# Altium PCB Msp430.PcbDoc
Units mil, origin at the board's own origin, x right, y up, seen from the top; angles counter-clockwise.
Board outline 2300 x 3100 mil, 2 copper layers (TOP, BOTTOM), stack 10.4 mil thick; 39 components, 36 nets, 147 pads, 30 vias.
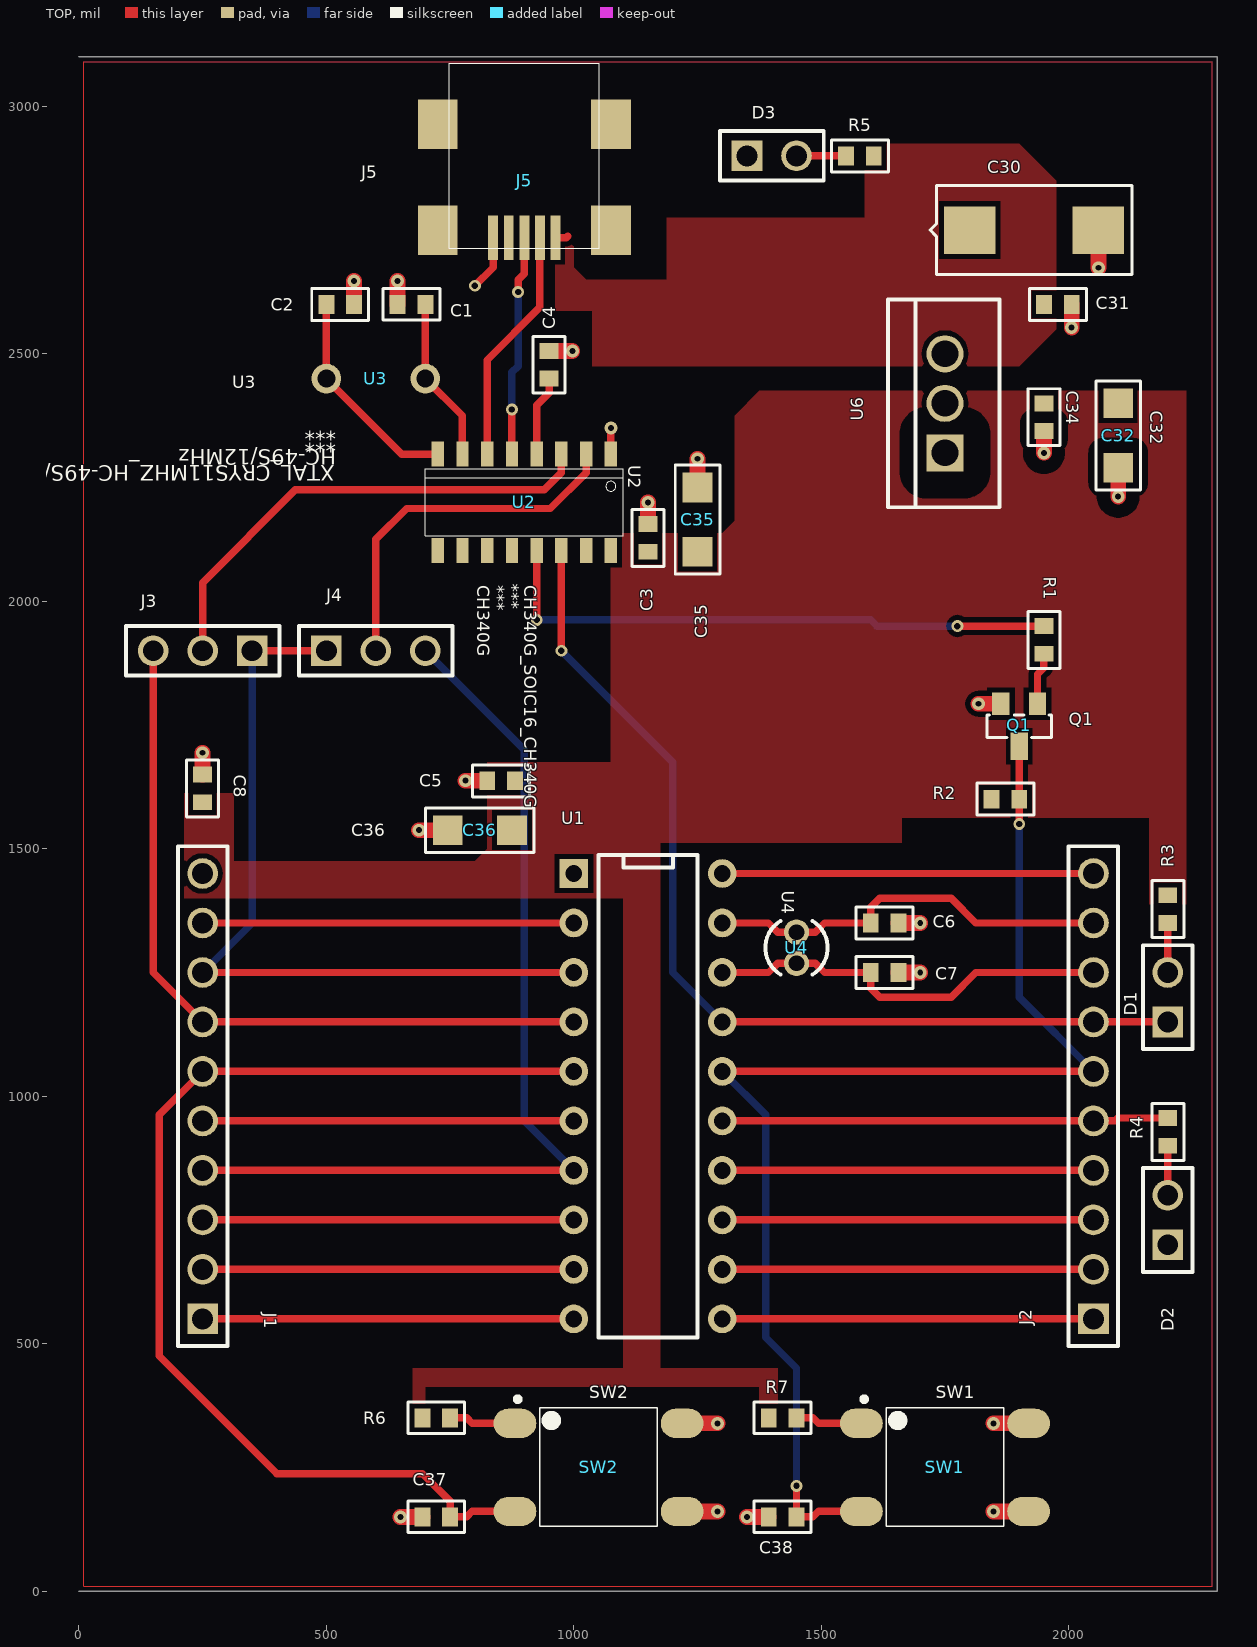
[diagram p0: TOP view]
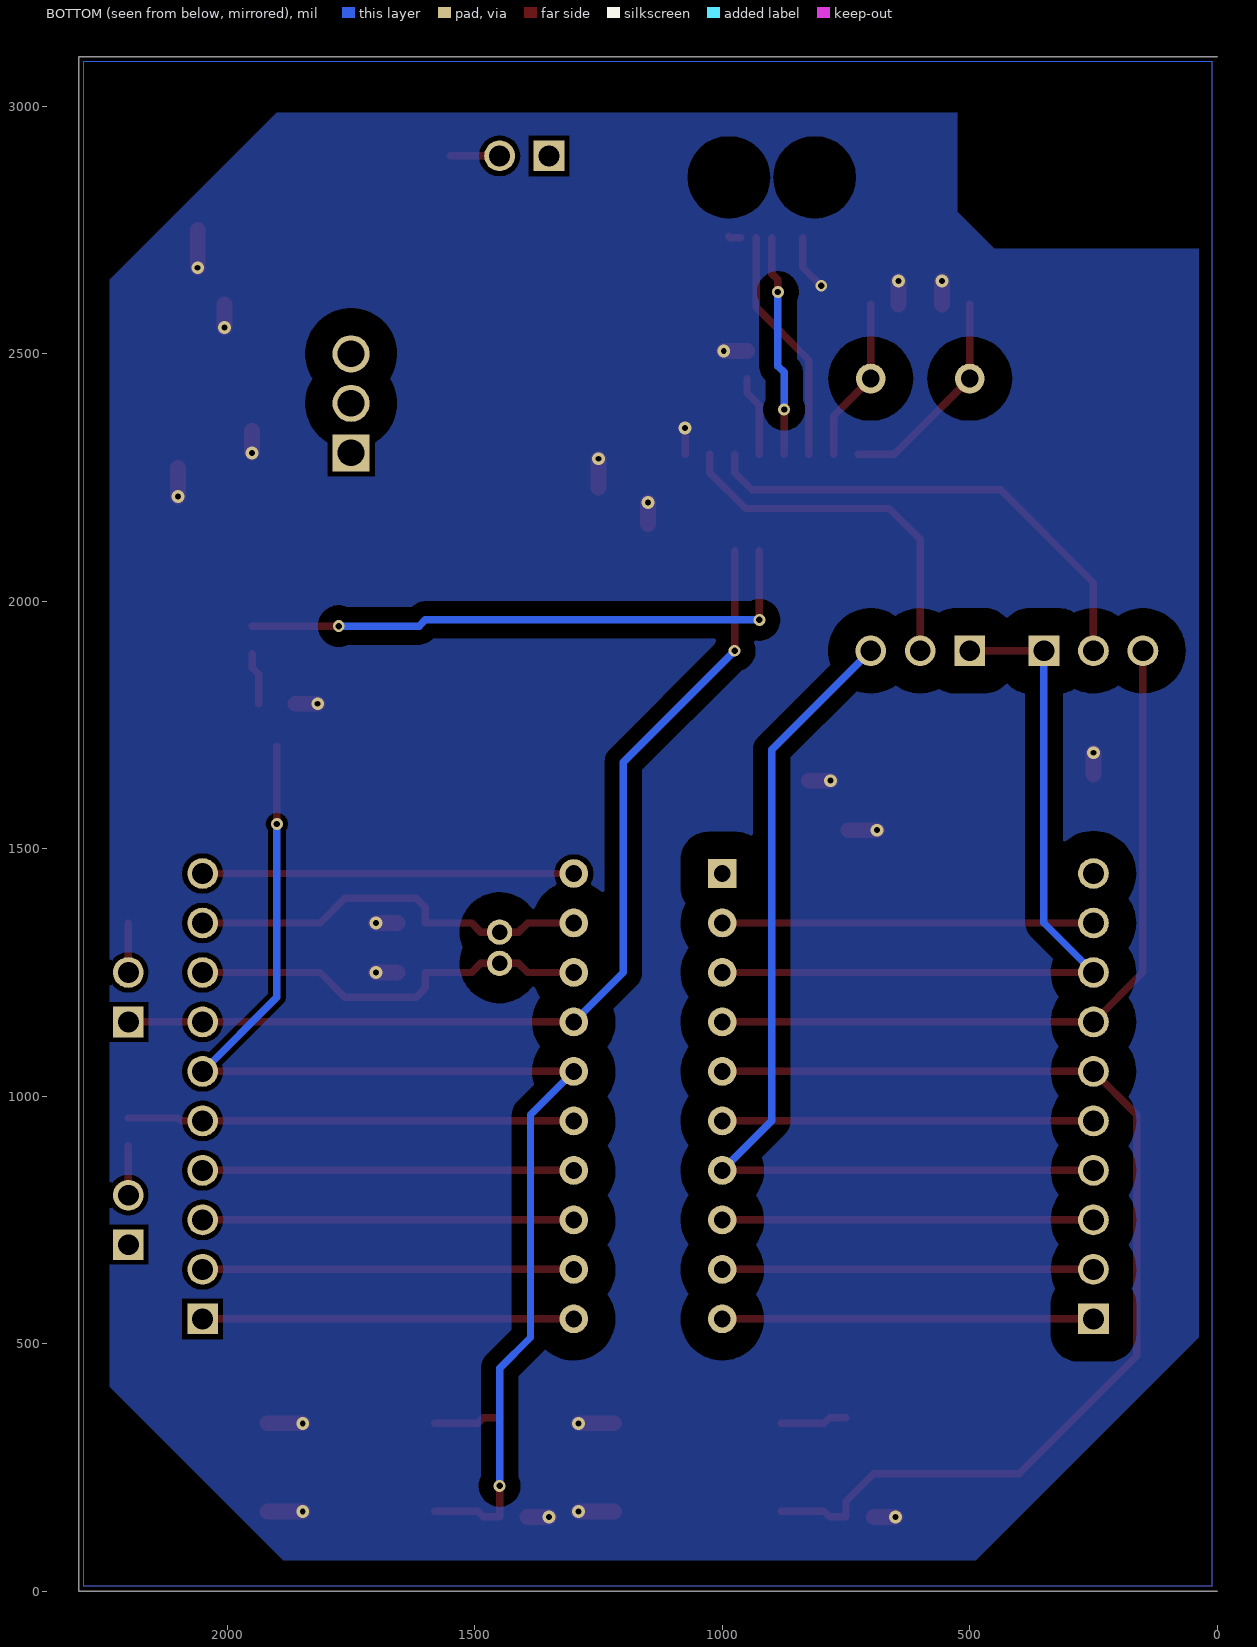
[diagram p1: BOTTOM view, seen from below]

## Layer stack, top to bottom
Top Solder: solder mask 0.4, Solder Resist, Dk 3.5
TOP: signal copper 1.2
Dielectric 1: core 8, FR-4, Dk 4.5
BOTTOM: signal copper 1.2
Bottom Solder: solder mask 0.4, Solder Resist, Dk 3.5

## Board outline
0,0 2300,0 2300,3100 0,3100 2300,3100 2300,0

## Design rules (kind name [scope] priority, off if disabled: settings)
Clearance [All] p1: gap=10 ignorepadtopadclearanceinfootprint=FALSE except(0: Arc-Hole Track-Hole SMDPad-Hole THPad-Hole Via-Hole Fill-Hole Poly-Hole Region-Hole Text-Hole)
PlaneConnect [All] p1: planeconnectstyle=Direct reliefexpansion=20 reliefentries=4 reliefconductorwidth=10 reliefairgap=10
PolygonConnect [All] p1: connectstyle=Direct reliefconductorwidth=10 reliefentries=4 polygonreliefangle="90 Angle" airgapwidth=10
RoutingVias [All] p1: holewidth=28 width=50 viastyle="Through Hole" minholewidth=28 minwidth=50 maxholewidth=28 maxwidth=50
SolderMaskExpansion [All] p1: expansion=4 istentingtop=FALSE
Width [All] p1: maxlimit=10 minlimit=10 preferedwidth=10 impedanceprofiledriven=TRUE minimp=105.260000 maximp=105.260000 favimp=105.260000
29 further rules are at their usual default settings.

## Components (designator, comment, footprint, x,y, rotation, side; value= is the part's Value field where it differs from the comment)
C1 "CAP NP_SMC0603_22PF" SMC0603#1 672,2600.25 r180 top
C2 "CAP NP_SMC0603_22PF" SMC0603#1 528,2599.75 r0 top
C3 "CAP NP_SMC0603_0.1UF" SMC0603#2 1150.25,2128 r90 top
C4 "CAP NP_SMC0603_0.1UF" SMC0603#1 950.25,2478 r90 top
C5 "CAP NP_SMC0603_0.1UF" SMC0603#3 853,1637.25 r0 top
C6 "CAP NP_SMC0603_22PF" SMC0603#2 1628,1349.75 r0 top
C7 "CAP NP_SMC0603_22PF" SMC0603#2 1628,1249.75 r0 top
C8 "CAP NP_SMC0603_0.1UF" SMC0603#3 249.75,1622 r270 top
C30 "CAP_SMCT7343_12_10UF" SMCT7343_12 1923.75,2750 r0 top
C31 "CAP NP_SMC0603_0.1UF" SMC0603#1 1978,2599.75 r0 top
C32 "CAPACITOR NON-POL_SMC1206_10UF" SMC1206 2100,2335 r270 top
C34 "CAP NP_SMC0603_0.1UF" SMC0603#2 1949.75,2372 r270 top
C35 "CAPACITOR NON-POL_SMC1206_10UF" SMC1206 1250,2165 r90 top
C36 "CAPACITOR NON-POL_SMC1206_10UF" SMC1206 810,1537.5 r180 top
C37 "CAP NP_SMC0603_0.1UF" SMC0603#2 722,150.25 r180 top
C38 "CAP NP_SMC0603_0.1UF" SMC0603#2 1422,150.25 r180 top
D1 "LED_BLKCON100VHTM1SQSW1002_RA-LED" BLKCON100VHTM1SQSW1002 2200,1200 r90 top
D2 "LED_BLKCON100VHTM1SQSW1002_RA-LED" BLKCON100VHTM1SQSW1002 2200,750 r90 top
D3 "LED_BLKCON100VHTM1SQSW1002_RA-LED" BLKCON100VHTM1SQSW1002 1400,2900 r0 top
J1 "HEADER 10_BLKCON100VHTM1SQSW10010_SIP10" BLKCON100VHTM1SQSW10010 250,1000 r90 top
J2 "HEADER 10_BLKCON100VHTM1SQSW10010_SIP10" BLKCON100VHTM1SQSW10010 2050,1000 r90 top
J3 "CON3_BLKCON100VHTM1SQSW1003_SIP3" BLKCON100VHTM1SQSW1003 250,1900 r180 top
J4 "CON3_BLKCON100VHTM1SQSW1003_SIP3" BLKCON100VHTM1SQSW1003 600,1900 r0 top
J5 "CON5_MUSB_MSUB" MUSB 900,2900 r180 top
Q1 "BC847AL_SOT23_123_BC547" SOT23_123 1901,1747.5 r180 top
R1 "R_SMR0603_1K" SMR0603 1949.75,1922 r270 top
R2 "R_SMR0603_1K" SMR0603 1872,1600.25 r180 top
R3 "R_SMR0603_1K" SMR0603 2200.25,1378 r90 top
R4 "R_SMR0603_1K" SMR0603 2200.25,928 r90 top
R5 "R_SMR0603_1K" SMR0603 1578,2899.75 r0 top
R6 "R_SMR0603_1K" SMR0603 722,350.25 r180 top
R7 "R_SMR0603_1K" SMR0603 1422,350.25 r180 top
SW1 "SW PUSHBUTTON-SPST-2_RESET_SW_RESET" RESET_SW#1 1750,250.5 r0 top
SW2 "SW PUSHBUTTON-SPST-2_RESET_SW_RESET" RESET_SW#2 1050,250.5 r0 top
U1 "MSP430G2553IN20_0_DIP10020W300L975_MSP430G2553IN" DIP10020W300L975 1150,1000 r270 top
U2 "CH340G_SOIC16_CH340G" SOIC16 900,2200 r270 top
U3 "XTAL_CRYS11MHZ_HC-49S/12MHZ" CRYS11MHZ 600,2452.5 r180 top
U4 "XTAL_XTAL32768_32.768KHZ" XTAL32768 1450,1300 r270 top
U6 "LT1085/LT_TO220AB_LTC1085-3.3" TO220AB 1747.5,2400 r90 top

## Footprints (in the part's own frame and the unit in brackets; to place one, negate y for a bottom-side part, rotate by r counter-clockwise, add the part's x,y. Pads: shape width x height; smd on the part's side, far side on the other; paste and mask are expansions set on the pad)
BLKCON100VHTM1SQSW1002 [mil] "BLKCON100VHTM1SQSW1002"
  rect 62x62 / inner round 60 / far side rect 62x62 hole 42: 1(-50,0)
  round 62 / inner round 60 / far side round 62 hole 42: 2(50,0)
  silkscreen extent -105,-50 105,50, body extent -109,-54 109,54, height 150
BLKCON100VHTM1SQSW1003 [mil] "BLKCON100VHTM1SQSW1003"
  rect 62x62 / inner round 60 / far side rect 62x62 hole 42: 1(-100,0)
  round 62 / inner round 60 / far side round 62 hole 42: 2(0,0) 3(100,0)
  silkscreen extent -155,-50 155,50, body extent -159,-54 159,54, height 150
BLKCON100VHTM1SQSW10010 [mil] "BLKCON100VHTM1SQSW10010"
  rect 62x62 / inner round 60 / far side rect 62x62 hole 42: 1(-450,0)
  round 62 / inner round 60 / far side round 62 hole 42: 2(-350,0) 3(-250,0) 4(-150,0) 5(-50,0) 6(50,0) 7(150,0) 8(250,0) 9(350,0) 10(450,0)
  silkscreen extent -505,-50 505,50, body extent -509,-54 509,54, height 150
CRYS11MHZ [mil] "CRYS11MHZ"
  round 60 hole 36: 1(-100,2.5) 2(100,2.5)
  body extent -200,-88 200,88, height 150
DIP10020W300L975 [mil] "DIP10020W300L975"
  rect 58x58 / inner round 60 / far side rect 58x58 hole 34: 1(-450,-150)
  round 58 / inner round 60 / far side round 58 hole 34: 2(-350,-150) 3(-250,-150) 4(-150,-150) 5(-50,-150) 6(50,-150) 7(150,-150) 8(250,-150) 9(350,-150) 10(450,-150) 11(450,150) 12(350,150) 13(250,150) 14(150,150) 15(50,150) 16(-50,150) 17(-150,150) 18(-250,150) 19(-350,150) 20(-450,150)
  silkscreen extent -488,-100 488,100, body extent -504,-204 504,204, height 150
MUSB [mil] "MUSB"
  rect 20x90 smd: 1(-62.99,165.35) 2(-31.5,165.35) 3(0,165.35) 4(31.5,165.35) 5(62.99,165.35)
  rect 80x100 smd: ""(-175.2,150.59) ""(-175.2,-63.98) ""(175.2,150.59) ""(175.2,-63.98)
  round 45 / inner round 60 / far side round 45 hole 50: ""(-86.61,43.31) ""(86.61,43.31)
  silkscreen extent -152,-187 152,187, body extent -152,-187 152,187, height 150
RESET_SW#1 [mil] "RESET_SW"
  oval 86.61x59.06 smd: 1(-169,88.5) 2(-169,-89.5) 3(169,-89.5) 4(169,88.5)
  TOP lines w32: 97.69,-89.5 169,-89.5 ; 97.69,88.5 169,88.5
  silkscreen extent -168,-120 119,142, body extent -119,-120 119,120, height 150
RESET_SW#2 [mil] "RESET_SW"
  oval 86.61x59.06 smd: 1(-169,88.5) 2(-169,-89.5) 3(169,-89.5) 4(169,88.5)
  TOP lines w32: 169,-89.5 240.3,-89.5 ; 169,88.5 240.3,88.5
  silkscreen extent -168,-120 119,142, body extent -119,-120 119,120, height 150
SMC0603#1 [mil] "SMC0603"
  rect 32x38 smd: 1(-28,0.25) 2(28,0.25)
  TOP lines w32: 28,0.25 28,-46.75
  silkscreen extent -58,-32 58,32, body extent -61,-35 61,35, height 150
SMC0603#2 [mil] "SMC0603"
  rect 32x38 smd: 1(-28,0.25) 2(28,0.25)
  TOP lines w32: 28,0.25 72,0.25
  silkscreen extent -58,-32 58,32, body extent -60,-35 60,35, height 150
SMC0603#3 [mil] "SMC0603"
  rect 32x38 smd: 1(-28,0.25) 2(28,0.25)
  TOP lines w32: -72,0.25 -28,0.25
  silkscreen extent -58,-32 58,32, body extent -60,-35 60,35, height 150
SMC1206 [mil] "SMC1206"
  rect 60x60 smd: 1(-65,0) 2(65,0)
  TOP lines w32: 123,0 65,0
  silkscreen extent -110,-45 110,45, body extent -113,-48 113,48, height 150
SMCT7343_12 [mil] "SMCT7343_12"
  rect 104x96 smd: 1(-123.75,0) 2(136.25,0)
  TOP lines w32: 136.25,-76 136.25,0
  silkscreen extent -204,-90 204,90, body extent -207,-93 207,93, height 150
SMR0603 [mil] "SMR0603"
  rect 32x38 smd: 1(-28,0.25) 2(28,0.25)
  silkscreen extent -58,-32 58,32, body extent -61,-35 61,35, height 150
SOIC16 [mil] "SOIC16"
  rect 50x25 smd: 1(-97.5,175) 2(-97.5,125) 3(-97.5,75) 4(-97.5,25) 5(-97.5,-25) 6(-97.5,-75) 7(-97.5,-125) 8(-97.5,-175) 9(97.5,-175) 10(97.5,-125) 11(97.5,-75) 12(97.5,-25) 13(97.5,25) 14(97.5,75) 15(97.5,125) 16(97.5,175)
  TOP lines w15: -97.5,175 -150.5,175
  silkscreen extent -68,-200 68,200, body extent -125,-200 125,200, height 150
SOT23_123 [mil] "SOT23_123"
  rect 35x45 smd: 1(-36,-45.5) 2(38,-45.5)
  rect 35x55 smd: 3(1,40.5)
  TOP lines w32: 83.5,-45.5 38,-45.5
  silkscreen extent -64,-23 66,23, body extent -61,-53 61,53, height 150
TO220AB [mil] "TO220AB"
  rect 75x75 / inner round 60 / far side rect 75x75 hole 54: 1(-100,-2.5)
  round 75 / inner round 60 / far side round 75 hole 54: 2(0,-2.5) 3(100,-2.5)
  silkscreen extent -210,-113 210,113, body extent -214,-117 214,117, height 150
XTAL32768 [mil] "XTAL32768"
  round 51.18 / inner round 60 / far side round 51.18 hole 31.5: 1(-31.5,0) 2(31.5,0)
  silkscreen extent -54,-63 54,63, body extent -71,-71 71,71, height 150

## Free pads (board coordinates)
  round 100 / inner round 60 / far side round 100 hole 110: ""(100,100) ""(100,3000) ""(2200,100) ""(2200,3000)

## Via types
v1: diameter 26, hole 12, TOP to BOTTOM, 22 vias
v2: diameter 24, hole 13, TOP to BOTTOM, 8 vias

## Nets (pads, with @x,y where several pads share a name; then routed paths per layer and width w, separated by ;. In a path a pad name is that pad's centre, name@x,y a point inside that pad or via, vN(x,y) a via of type N, cw(c..) or ccw(c..) an arc to the next point about the centre after c; other vN are vias at no path point)
DM:  | length 481.3
  TOP w15: 825,2297.5 825,2487.49 931.5,2593.99 931.5,2734.65
DP:  | length 447.5
  TOP w15: 875,2297.5 v2(875,2387.5) ; v2(887.5,2625) 887.5,2649.5 900,2662 900,2734.65
  BOTTOM w15: v2(875,2387.5) 875,2462.5 887.5,2475 v2(887.5,2625)
DTR:  | length 1170.2
  TOP w15: v2(925,1962.5) 925,2102.5 ; v2(1775,1950) 1950,1950
  BOTTOM w15: v2(925,1962.5) 1600,1962.5 1612.5,1950 v2(1775,1950)
GND:  | length 862.5
  TOP w15: v2(800,2637.5) 837.01,2674.51 837.01,2734.65 ; 1300,1450 2050,1450
  other v1: 650,150 1350,150 1290.3,161 1847.69,161 1290.3,339 1847.69,339 1700,1250 1700,1350 687,1537.5 781,1637.5 250,1694 1817.5,1793 1150,2200 2100,2212 1250,2288 1950,2300 1075,2350.5 997,2506 2006,2553 556,2647 644,2647 2060,2674
ID: 
N00296:  | length 438.2
  TOP w15: 500,2600 500,2450 652.5,2297.5 725,2297.5
N00303:  | length 333.6
  TOP w15: 700,2600 700,2450 775,2375 775,2297.5
N00442:  | length 162.9
  TOP w15: 925,2297.5 925,2396.5 950,2421.5 950,2450
N04021:  | length 100
  TOP w15: 2200,1250 2200,1350
N04124:  | length 100
  TOP w15: 2200,800 2200,900
N04260:  | length 100
  TOP w15: 1450,2900 1550,2900
N06554:  | length 135.6
  TOP w15: 750,350 783.38,350 794.38,339 881,339
N06863:  | length 135.6
  TOP w15: 1450,350 1483.38,350 1494.38,339 1581,339
N007191:  | length 106.4
  TOP w15: 1937,1793 1937,1852.5 1950,1865.5 1950,1894
P1.0:  | length 750
  TOP w15: 250,1350 1000,1350
P1.1:  | length 1591.4
  TOP w15: 250,1250 1000,1250 ; 350,1900 500,1900
  BOTTOM w15: 250,1250 350,1350 350,1900
P1.2:  | length 1541.4
  TOP w15: 150,1900 150,1250 250,1150 1000,1150
P1.3:  | length 2237.4
  TOP w15: 881,161 794.38,161 783.38,150 750,150 750,181.5 694,237.5 400,237.5 162.5,475 162.5,962.5 250,1050 1000,1050
P1.4:  | length 750
  TOP w15: 250,950 1000,950
P1.5:  | length 1924.3
  TOP w15: 250,850 1000,850
  BOTTOM w15: 700,1900 900,1700 900,950 1000,850
P1.6:  | length 750
  TOP w15: 1300,850 2050,850
P1.7:  | length 902.5
  TOP w15: 1300,950 2050,950 2093.5,950 2099.5,956 2200,956
P2.0:  | length 750
  TOP w15: 250,750 1000,750
P2.1:  | length 750
  TOP w15: 250,650 1000,650
P2.2:  | length 750
  TOP w15: 250,550 1000,550
P2.3:  | length 750
  TOP w15: 1300,550 2050,550
P2.4:  | length 750
  TOP w15: 1300,650 2050,650
P2.5:  | length 750
  TOP w15: 1300,750 2050,750
RESET:  | length 2566.8
  TOP w15: 1300,1050 2050,1050 ; v2(1450,212.5) 1450,150 1483.38,150 1494.38,161 1581,161 ; v2(1900,1550) 1900,1600 1900,1707
  BOTTOM w15: 1300,1050 1387.5,962.5 1387.5,512.5 1450,450 v2(1450,212.5) ; v2(1900,1550) 1900,1200 2050,1050
RTS/TEST:  | length 1987.1
  TOP w15: v2(975,1900) 975,2102.5 ; 1300,1150 2050,1150 2200,1150
  BOTTOM w15: v2(975,1900) 1200,1675 1200,1250 1300,1150
RXD:  | length 992.2
  TOP w15: 250,1900 250,2037.5 437.5,2225 940,2225 975,2260 975,2297.5
TXD:  | length 743.4
  TOP w15: 600,1900 600,2125 662.5,2187.5 952.5,2187.5 1025,2260 1025,2297.5
VCC+3.3V: 
VCC+5V:  | length 25.7
  TOP w15: 962.99,2734.65 984.65,2734.65 987.5,2737.5
XIN:  | length 825.2
  TOP w15: 1300,1350 1393.4,1350 1411.9,1331.5 1450,1331.5 1488.1,1331.5 1506.6,1350 1600,1350 1600,1381.5 1618.5,1400 1762.5,1400 1812.5,1350 2050,1350
XOUT:  | length 825.2
  TOP w15: 1300,1250 1393.4,1250 1411.9,1268.5 1450,1268.5 1488.1,1268.5 1506.6,1250 1600,1250 1600,1218.5 1618.5,1200 1762.5,1200 1812.5,1250 2050,1250
pads on no net: C1.1 C1.2 C2.1 C2.2 C3.1 C3.2 C4.1 C4.2 C5.1 C5.2 C6.1 C6.2 C7.1 C7.2 C8.1 C8.2 C30.1 C30.2 C31.1 C31.2 C32.1 C32.2 C34.1 C34.2 C35.1 C35.2 C36.1 C36.2 C37.1 C37.2 C38.1 C38.2 D1.1 D1.2 D2.1 D2.2 D3.1 D3.2 J1.1 J1.2 J1.3 J1.4 J1.5 J1.6 J1.7 J1.8 J1.9 J1.10 J2.1 J2.2 J2.3 J2.4 J2.5 J2.6 J2.7 J2.8 J2.9 J2.10 J3.1 J3.2 J3.3 J4.1 J4.2 J4.3 J5. J5.1 J5.2 J5.3 J5.4 J5.5 Q1.1 Q1.2 Q1.3 R1.1 R1.2 R2.1 R2.2 R3.1 R3.2 R4.1 R4.2 R5.1 R5.2 R6.1 R6.2 R7.1 R7.2 SW1.1 SW1.2 SW1.3 SW1.4 SW2.1 SW2.2 SW2.3 SW2.4 U1.1 U1.2 U1.3 U1.4 U1.5 U1.6 U1.7 U1.8 U1.9 U1.10 U1.11 U1.12 U1.13 U1.14 U1.15 U1.16 U1.17 U1.18 U1.19 U1.20 U2.1 U2.2 U2.3 U2.4 U2.5 U2.6 U2.7 U2.8 U2.9 U2.10 U2.11 U2.12 U2.13 U2.14 U2.15 U2.16 U3.1 U3.2 U4.1 U4.2 U6.1 U6.2 U6.3

## Polygon pours and split planes (outlines as drawn)
VCC+3.3V on TOP "TOP-VCC+3.3V" (solid, pour order 1): 1075,2137.5 1075,1675 825,1675 825,1500 800,1475 312.5,1475 312.5,1612.5 212.5,1612.5 212.5,1400 1100,1400 1100,450 675,450 675,325 700,325 700,412.5 1375,412.5 1375,312.5 1412.5,312.5 1412.5,450 1175,450 1175,1512.5 1662.5,1512.5 1662.5,1562.5 2162.5,1562.5 2162.5,1387.5 2237.5,1387.5 2237.5,2425 1375,2425 1325,2375 1325,2162.5 1300,2137.5 1075,2137.5
VCC+5V on TOP "TOP-VCC+5V" (solid, pour order 0): 1975,2850 1975,2550 1900,2475 1037.5,2475 1037.5,2587.5 962.5,2587.5 962.5,2775 1000,2775 1000,2675 1025,2650 1187.5,2650 1187.5,2775 1587.5,2775 1587.5,2925 1900,2925 1975,2850
GND on BOTTOM "BOTTOM-GND" (solid, pour order 2): 37.5,2712.5 450,2712.5 525,2787.5 525,2987.5 1900,2987.5 2237.5,2650 2237.5,412.5 1887.5,62.5 487.5,62.5 37.5,512.5 37.5,2712.5

## Other copper
TOP:
  pour cut-out net VCC+3.3V: 1900.98,2328 1900.98,2360 1901.09,2362.62 1901.44,2365.21 1902,2367.77 1902.79,2370.27 1903.79,2372.69 1905,2375.01 1906.41,2377.22 1908,2379.3 1909.77,2381.23 1911.7,2383 1913.78,2384.59 1915.99,2386 1918.31,2387.21 1920.73,2388.21 1923.23,2389 1925.79,2389.56 1928.38,2389.91 1931,2390.02 1969,2390.02 1971.62,2389.91 1974.21,2389.56 1976.77,2389 1979.27,2388.21 1981.69,2387.21 1984.01,2386 1986.22,2384.59 1988.3,2383 1990.23,2381.23 1992,2379.3 1993.59,2377.22 1995,2375.01 1996.21,2372.69 1997.21,2370.27 1998,2367.77 1998.56,2365.21 1998.91,2362.62 1999.02,2360 1999.02,2328 1998.9,2325.38 1998.56,2322.79 1997.99,2320.23 1997.21,2317.73 1996.2,2315.32 1994.99,2312.99 1993.59,2310.79 1992.1,2308.84 1992.71,2305.14 1993,2301.4 1993.02,2300 1992.86,2296.25 1992.37,2292.53 1991.55,2288.87 1990.43,2285.29 1988.99,2281.82 1987.26,2278.49 1985.24,2275.32 1982.96,2272.35 1980.42,2269.58 1977.65,2267.04 1974.68,2264.76 1971.51,2262.74 1968.18,2261.01 1964.71,2259.57 1961.13,2258.45 1957.47,2257.63 1953.75,2257.14 1950,2256.98 1946.25,2257.14 1942.53,2257.63 1938.87,2258.45 1935.29,2259.57 1931.82,2261.01 1928.49,2262.74 1925.32,2264.76 1922.35,2267.04 1919.58,2269.58 1917.04,2272.35 1914.76,2275.32 1912.74,2278.49 1911.01,2281.82 1909.57,2285.29 1908.45,2288.87 1907.63,2292.53 1907.14,2296.25 1906.98,2300 1907.14,2303.75 1907.64,2307.47 1907.9,2308.84 1906.32,2310.93 1904.92,2313.14 1903.73,2315.47 1902.74,2317.9 1901.96,2320.4 1901.41,2322.96 1901.08,2325.55 1900.98,2328
  pour cut-out net VCC+3.3V: 2039.98,2240 2039.98,2300 2040.09,2302.62 2040.44,2305.21 2041,2307.77 2041.79,2310.27 2042.79,2312.69 2044,2315.01 2045.41,2317.22 2047,2319.3 2048.77,2321.23 2050.7,2323 2052.78,2324.59 2054.99,2326 2057.31,2327.21 2059.73,2328.21 2062.23,2329 2064.79,2329.56 2067.38,2329.91 2070,2330.02 2130,2330.02 2132.62,2329.91 2135.21,2329.56 2137.77,2329 2140.27,2328.21 2142.69,2327.21 2145.01,2326 2147.22,2324.59 2149.3,2323 2151.23,2321.23 2153,2319.3 2154.59,2317.22 2156,2315.01 2157.21,2312.69 2158.21,2310.27 2159,2307.77 2159.56,2305.21 2159.91,2302.62 2160.02,2300 2160.02,2240 2159.91,2237.38 2159.56,2234.79 2159,2232.23 2158.21,2229.73 2157.21,2227.32 2156,2224.99 2154.59,2222.79 2153,2220.71 2151.23,2218.78 2149.3,2217.01 2147.22,2215.41 2145.01,2214.01 2143.01,2212.95 2143.02,2212 2142.86,2208.25 2142.37,2204.53 2141.55,2200.87 2140.43,2197.29 2138.99,2193.82 2137.26,2190.49 2135.24,2187.32 2132.96,2184.35 2130.42,2181.58 2127.65,2179.04 2124.68,2176.76 2121.51,2174.74 2118.18,2173.01 2114.71,2171.57 2111.13,2170.45 2107.47,2169.63 2103.75,2169.14 2100,2168.98 2096.25,2169.14 2092.53,2169.63 2088.87,2170.45 2085.29,2171.57 2081.82,2173.01 2078.49,2174.74 2075.32,2176.76 2072.35,2179.04 2069.58,2181.58 2067.04,2184.35 2064.76,2187.32 2062.74,2190.49 2061.01,2193.82 2059.57,2197.29 2058.45,2200.87 2057.63,2204.53 2057.14,2208.25 2056.98,2212 2056.99,2212.95 2054.68,2214.19 2052.49,2215.62 2050.43,2217.24 2048.52,2219.03 2046.78,2220.98 2045.21,2223.08 2043.83,2225.3 2042.64,2227.64 2041.67,2230.07 2040.91,2232.57 2040.38,2235.14 2040.07,2237.74 2039.98,2240
  pour cut-out net VCC+3.3V: 1657.48,2262.5 1657.48,2337.5 1657.69,2342.3 1658.32,2347.05 1659.35,2351.74 1660.8,2356.32 1662.63,2360.75 1664.85,2365.01 1667.43,2369.06 1670.35,2372.87 1673.6,2376.41 1677.13,2379.65 1680.94,2382.57 1684.99,2385.15 1689.25,2387.37 1693.68,2389.2 1698.26,2390.65 1702.95,2391.68 1707.7,2392.31 1712.5,2392.52 1787.5,2392.52 1792.3,2392.31 1797.05,2391.68 1801.74,2390.65 1806.32,2389.2 1810.75,2387.37 1815.01,2385.15 1819.06,2382.57 1822.87,2379.65 1826.4,2376.41 1829.65,2372.87 1832.57,2369.06 1835.15,2365.01 1837.37,2360.75 1839.2,2356.32 1840.65,2351.74 1841.68,2347.05 1842.31,2342.3 1842.52,2337.5 1842.52,2262.5 1842.31,2257.7 1841.68,2252.95 1840.65,2248.26 1839.2,2243.68 1837.37,2239.25 1835.15,2234.99 1832.57,2230.94 1829.65,2227.13 1826.4,2223.59 1822.87,2220.35 1819.06,2217.43 1815.01,2214.85 1810.75,2212.63 1806.32,2210.8 1801.74,2209.35 1797.05,2208.32 1792.3,2207.69 1787.5,2207.48 1712.5,2207.48 1707.7,2207.69 1702.95,2208.32 1698.26,2209.35 1693.68,2210.8 1689.25,2212.63 1684.99,2214.85 1680.94,2217.43 1677.13,2220.35 1673.6,2223.59 1670.35,2227.13 1667.43,2230.94 1664.85,2234.99 1662.63,2239.25 1660.8,2243.68 1659.35,2248.26 1658.32,2252.95 1657.69,2257.7 1657.48,2262.5
BOTTOM:
  pour cut-out net GND: 585.43,2450 583.79,2466.67 578.93,2482.69 571.03,2497.46 560.41,2510.41 547.46,2521.03 532.69,2528.93 516.67,2533.79 500,2535.43 483.33,2533.79 467.31,2528.93 457.47,2523.67 452.54,2521.03 439.59,2510.41 428.97,2497.46 421.07,2482.69 416.21,2466.67 414.57,2450 416.21,2433.33 421.07,2417.31 428.97,2402.54 439.59,2389.59 452.54,2378.97 457.47,2376.33 467.31,2371.07 483.33,2366.21 500,2364.57 516.67,2366.21 532.69,2371.07 547.46,2378.97 560.41,2389.59 571.03,2402.54 578.93,2417.31 583.79,2433.33 585.43,2450
  pour cut-out net GND: 785.43,2450 783.79,2466.67 778.93,2482.69 771.03,2497.46 760.41,2510.41 747.46,2521.03 732.69,2528.93 716.67,2533.79 700,2535.43 683.33,2533.79 667.31,2528.93 657.47,2523.67 652.54,2521.03 639.59,2510.41 628.97,2497.46 621.07,2482.69 616.21,2466.67 614.57,2450 616.21,2433.33 621.07,2417.31 628.97,2402.54 639.59,2389.59 652.54,2378.97 657.47,2376.33 667.31,2371.07 683.33,2366.21 700,2364.57 716.67,2366.21 732.69,2371.07 747.46,2378.97 760.41,2389.59 771.03,2402.54 778.93,2417.31 783.79,2433.33 785.43,2450
  pour cut-out net GND: 896.81,2856.69 895.21,2872.96 890.46,2888.61 882.75,2903.04 872.38,2915.68 859.74,2926.05 845.31,2933.76 829.66,2938.51 813.39,2940.11 797.12,2938.51 781.47,2933.76 771.86,2928.63 767.04,2926.05 754.4,2915.68 744.03,2903.04 736.32,2888.61 731.57,2872.96 729.97,2856.69 731.57,2840.42 736.32,2824.77 744.03,2810.34 754.4,2797.7 767.04,2787.33 771.86,2784.75 781.47,2779.62 797.12,2774.87 813.39,2773.27 829.66,2774.87 845.31,2779.62 859.74,2787.33 872.38,2797.7 882.75,2810.34 890.46,2824.77 895.21,2840.42 896.81,2856.69
  pour cut-out net GND: 1070.03,2856.69 1068.43,2872.96 1063.68,2888.61 1055.97,2903.04 1045.6,2915.68 1032.96,2926.05 1018.53,2933.76 1002.88,2938.51 986.61,2940.11 970.34,2938.51 954.69,2933.76 945.08,2928.63 940.26,2926.05 927.62,2915.68 917.25,2903.04 909.54,2888.61 904.79,2872.96 903.19,2856.69 904.79,2840.42 909.54,2824.77 917.25,2810.34 927.62,2797.7 940.26,2787.33 945.08,2784.75 954.69,2779.62 970.34,2774.87 986.61,2773.27 1002.88,2774.87 1018.53,2779.62 1032.96,2787.33 1045.6,2797.7 1055.97,2810.34 1063.68,2824.77 1068.43,2840.42 1070.03,2856.69
  pour cut-out net GND: 849.98,2490.54 849.98,2606.07 848.47,2609.41 847.26,2612.87 846.36,2616.43 845.77,2620.04 845.5,2623.7 845.48,2625 845.64,2628.66 846.12,2632.3 846.91,2635.88 848.01,2639.37 849.42,2642.76 851.11,2646.01 853.08,2649.1 855.31,2652.01 857.79,2654.71 860.49,2657.19 863.4,2659.42 866.49,2661.39 869.74,2663.08 873.13,2664.49 876.62,2665.59 880.2,2666.38 883.84,2666.86 887.5,2667.02 891.16,2666.86 894.8,2666.38 898.38,2665.59 901.87,2664.49 905.26,2663.08 908.51,2661.39 911.6,2659.42 914.51,2657.19 917.21,2654.71 919.69,2652.01 921.92,2649.1 923.89,2646.01 925.58,2642.76 926.99,2639.37 928.09,2635.88 928.88,2632.3 929.36,2628.66 929.52,2625 929.36,2621.34 928.88,2617.7 928.09,2614.12 926.99,2610.63 925.59,2607.24 925.02,2606.07 925.02,2475 924.88,2471.73 924.45,2468.49 923.74,2465.29 922.76,2462.17 921.5,2459.14 919.99,2456.24 918.24,2453.48 916.24,2450.88 914.03,2448.47 912.52,2446.96 912.52,2406.43 914.03,2403.09 915.24,2399.63 916.14,2396.07 916.73,2392.46 917,2388.8 917.02,2387.5 916.86,2383.84 916.38,2380.2 915.59,2376.62 914.49,2373.13 913.08,2369.74 911.39,2366.49 909.42,2363.4 907.19,2360.49 904.71,2357.79 902.01,2355.31 899.1,2353.08 896.01,2351.11 892.76,2349.42 889.37,2348.01 885.88,2346.91 882.3,2346.12 878.66,2345.64 875,2345.48 871.34,2345.64 867.7,2346.12 864.12,2346.91 860.63,2348.01 857.24,2349.42 853.99,2351.11 850.9,2353.08 847.99,2355.31 845.29,2357.79 842.81,2360.49 840.58,2363.4 838.61,2366.49 836.92,2369.74 835.51,2373.13 834.41,2376.62 833.62,2380.2 833.14,2383.84 832.98,2387.5 833.14,2391.16 833.62,2394.8 834.41,2398.38 835.51,2401.87 836.91,2405.26 837.48,2406.43 837.48,2462.5 837.62,2465.77 838.05,2469.01 838.76,2472.21 839.74,2475.33 841,2478.36 842.51,2481.26 844.26,2484.02 846.26,2486.62 848.47,2489.03 849.98,2490.54
  pour cut-out net GND: 1827.85,2450 1831.91,2443.02 1835.35,2435.72 1838.14,2428.15 1840.25,2420.36 1841.68,2412.41 1842.42,2404.38 1842.52,2400 1842.17,2391.94 1841.11,2383.93 1839.37,2376.05 1836.94,2368.36 1833.85,2360.9 1830.12,2353.74 1825.79,2346.93 1820.87,2340.53 1815.42,2334.58 1809.47,2329.13 1803.07,2324.21 1796.26,2319.88 1789.1,2316.15 1781.64,2313.06 1773.95,2310.63 1766.07,2308.89 1758.06,2307.83 1750,2307.48 1741.94,2307.83 1733.93,2308.89 1726.05,2310.63 1718.36,2313.06 1710.9,2316.15 1703.74,2319.88 1696.93,2324.21 1690.53,2329.13 1684.58,2334.58 1679.13,2340.53 1674.21,2346.93 1669.88,2353.74 1666.15,2360.9 1663.06,2368.36 1660.63,2376.05 1658.89,2383.93 1657.83,2391.94 1657.48,2400 1657.83,2408.06 1658.88,2416.07 1660.63,2423.95 1663.06,2431.64 1666.15,2439.1 1669.87,2446.26 1672.15,2450 1668.09,2456.98 1664.65,2464.28 1661.86,2471.85 1659.75,2479.64 1658.32,2487.59 1657.58,2495.62 1657.48,2500 1657.83,2508.06 1658.89,2516.07 1660.63,2523.95 1663.06,2531.64 1666.15,2539.1 1669.88,2546.26 1674.21,2553.07 1679.13,2559.47 1684.58,2565.42 1690.53,2570.87 1696.93,2575.79 1703.74,2580.12 1710.9,2583.85 1718.36,2586.94 1726.05,2589.37 1733.93,2591.11 1741.94,2592.17 1750,2592.52 1758.06,2592.17 1766.07,2591.11 1773.95,2589.37 1781.64,2586.94 1789.1,2583.85 1796.26,2580.12 1803.07,2575.79 1809.47,2570.87 1815.42,2565.42 1820.87,2559.47 1825.79,2553.07 1830.12,2546.26 1833.85,2539.1 1836.94,2531.64 1839.37,2523.95 1841.11,2516.07 1842.17,2508.06 1842.52,2500 1842.17,2491.94 1841.12,2483.93 1839.37,2476.05 1836.94,2468.36 1833.85,2460.9 1830.13,2453.74 1827.85,2450
  pour cut-out net GND: 663 vertices and 0 holes, not listed, extent 882.98,170.48 1817.02,2004.52
  pour cut-out net GND: 1010 vertices and 0 holes, not listed, extent 63.98,463.98 1084.02,1986.02
Multi-Layer:
  lines w1: 10,10 10,3090 ; 10,10 2290,10 ; 10,10 10,3090 ; 10,10 2290,10 ; 10,3090 2290,3090 ; 10,3090 2290,3090 ; 2290,10 2290,3090 ; 2290,10 2290,3090

## Silkscreen, mask and mechanical layers (free items; w line width, h text height)
DESIGN_OUTLINE:
  lines w1: 0,0 2300,0 2300,3100 0,3100 0,0
  lines w5: 0,0 2300,0 2300,3100 0,3100 0,0
DRAWING_ORIGIN:
  lines w1: -25,0 25,0 ; 0,-25 0,25

## Text inside footprints (layer, text, board x,y; h text height)
C1: PIN_NUMBER "2" at 634,2600 h25 r180; PIN_NUMBER "1" at 690,2600 h25 r180
C2: PIN_NUMBER "2" at 546,2600 h25; PIN_NUMBER "1" at 490,2600 h25
C3: PIN_NUMBER "2" at 1140,2156 h25 r90; PIN_NUMBER "1" at 1140,2100 h25 r90
C4: PIN_NUMBER "2" at 940,2506 h25 r90; PIN_NUMBER "1" at 940,2450 h25 r90
C5: PIN_NUMBER "1" at 815,1637.5 h25; PIN_NUMBER "2" at 871,1637.5 h25
C6: PIN_NUMBER "2" at 1646,1350 h25; PIN_NUMBER "1" at 1590,1350 h25
C7: PIN_NUMBER "2" at 1646,1250 h25; PIN_NUMBER "1" at 1590,1250 h25
C8: PIN_NUMBER "1" at 240,1650 h25 r270; PIN_NUMBER "2" at 240,1594 h25 r270
C30: PIN_NUMBER "2" at 2054,2750 h15; PIN_NUMBER "1" at 1794,2750 h15
C31: PIN_NUMBER "2" at 1996,2600 h25; PIN_NUMBER "1" at 1940,2600 h25
C32: PIN_NUMBER "2" at 2090,2270 h25 r270; PIN_NUMBER "1" at 2090,2400 h25 r270
C34: PIN_NUMBER "2" at 1940,2344 h25 r270; PIN_NUMBER "1" at 1940,2400 h25 r270
C35: PIN_NUMBER "2" at 1240,2230 h25 r90; PIN_NUMBER "1" at 1240,2100 h25 r90
C36: PIN_NUMBER "2" at 735,1537.5 h25 r180; PIN_NUMBER "1" at 865,1537.5 h25 r180
C37: PIN_NUMBER "2" at 684,150 h25 r180; PIN_NUMBER "1" at 740,150 h25 r180
C38: PIN_NUMBER "2" at 1384,150 h25 r180; PIN_NUMBER "1" at 1440,150 h25 r180
D1: PIN_NUMBER "1" at 2190,1150 h25 r90; PIN_NUMBER "2" at 2190,1250 h25 r90
D2: PIN_NUMBER "1" at 2190,700 h25 r90; PIN_NUMBER "2" at 2190,800 h25 r90
D3: PIN_NUMBER "1" at 1270,2885 h15; PIN_NUMBER "1" at 1340,2900 h25; PIN_NUMBER "2" at 1440,2900 h25
J1: PIN_NUMBER "10" at 230,1450 h25 r90; PIN_NUMBER "9" at 240,1350 h25 r90; PIN_NUMBER "8" at 240,1250 h25 r90; PIN_NUMBER "7" at 240,1150 h25 r90; PIN_NUMBER "6" at 240,1050 h25 r90; PIN_NUMBER "5" at 240,950 h25 r90; PIN_NUMBER "4" at 240,850 h25 r90; PIN_NUMBER "3" at 240,750 h25 r90; PIN_NUMBER "2" at 240,650 h25 r90; PIN_NUMBER "1" at 240,550 h25 r90
J2: PIN_NUMBER "10" at 2030,1450 h25 r90; PIN_NUMBER "7" at 2040,1150 h25 r90; PIN_NUMBER "6" at 2040,1050 h25 r90; PIN_NUMBER "4" at 2040,850 h25 r90; PIN_NUMBER "5" at 2040,950 h25 r90; PIN_NUMBER "1" at 2040,550 h25 r90; PIN_NUMBER "2" at 2040,650 h25 r90; PIN_NUMBER "3" at 2040,750 h25 r90; PIN_NUMBER "9" at 2040,1350 h25 r90; PIN_NUMBER "8" at 2040,1250 h25 r90
J3: PIN_NUMBER "2" at 240,1900 h25 r180; PIN_NUMBER "1" at 340,1900 h25 r180; PIN_NUMBER "3" at 140,1900 h25 r180
J4: PIN_NUMBER "2" at 590,1900 h25; PIN_NUMBER "1" at 490,1900 h25; PIN_NUMBER "3" at 690,1900 h25
J5: PIN_NUMBER "4" at 858.5,2734.65 h25 r180; PIN_NUMBER "3" at 890,2734.65 h25 r180; PIN_NUMBER "5" at 827.01,2734.65 h25 r180; PIN_NUMBER "2" at 921.5,2734.65 h25 r180; PIN_NUMBER "1" at 952.99,2734.65 h25 r180; ASSEMBLY_TOP "J*" at 1003.94,2645.28 h25 r180
Q1: PIN_NUMBER "2" at 1853,1793 h25 r180; PIN_NUMBER "1" at 1927,1793 h25 r180; PIN_NUMBER "3" at 1890,1707 h25 r180; ASSEMBLY_TOP "SOT23_123" at 1775,1837.5 h25 r180; ASSEMBLY_TOP "BC547" at 1975,1880 h25 r180
R1: PIN_NUMBER "1" at 1940,1950 h25 r270; PIN_NUMBER "2" at 1940,1894 h25 r270
R2: PIN_NUMBER "2" at 1834,1600 h25 r180; PIN_NUMBER "1" at 1890,1600 h25 r180
R3: PIN_NUMBER "2" at 2190,1406 h25 r90; PIN_NUMBER "1" at 2190,1350 h25 r90
R4: PIN_NUMBER "2" at 2190,956 h25 r90; PIN_NUMBER "1" at 2190,900 h25 r90
R5: PIN_NUMBER "1" at 1544,2900 h15; PIN_NUMBER "2" at 1600,2900 h15
R6: PIN_NUMBER "1" at 740,350 h25 r180; PIN_NUMBER "2" at 684,350 h25 r180
R7: PIN_NUMBER "1" at 1440,350 h25 r180; PIN_NUMBER "2" at 1384,350 h25 r180
SW1: PIN_NUMBER "1" at 1571,339 h25; PIN_NUMBER "4" at 1909,339 h25; PIN_NUMBER "3" at 1909,161 h25; PIN_NUMBER "2" at 1571,161 h25
SW2: PIN_NUMBER "1" at 871,339 h25; PIN_NUMBER "3" at 1209,161 h25; PIN_NUMBER "4" at 1209,339 h25; PIN_NUMBER "2" at 871,161 h25
U1: PIN_NUMBER "20" at 1280,1450 h25 r270; PIN_NUMBER "1" at 990,1450 h25 r270; PIN_NUMBER "17" at 1280,1150 h25 r270; PIN_NUMBER "16" at 1280,1050 h25 r270; PIN_NUMBER "2" at 990,1350 h25 r270; PIN_NUMBER "3" at 990,1250 h25 r270; PIN_NUMBER "4" at 990,1150 h25 r270; PIN_NUMBER "5" at 990,1050 h25 r270; PIN_NUMBER "6" at 990,950 h25 r270; PIN_NUMBER "7" at 990,850 h25 r270; PIN_NUMBER "14" at 1280,850 h25 r270; PIN_NUMBER "15" at 1280,950 h25 r270; PIN_NUMBER "8" at 990,750 h25 r270; PIN_NUMBER "9" at 990,650 h25 r270; PIN_NUMBER "10" at 980,550 h25 r270; PIN_NUMBER "11" at 1280,550 h25 r270; PIN_NUMBER "12" at 1280,650 h25 r270; PIN_NUMBER "13" at 1280,750 h25 r270; PIN_NUMBER "19" at 1280,1350 h25 r270; PIN_NUMBER "18" at 1280,1250 h25 r270
U2: PIN_NUMBER "9" at 700,2057.5 h25 r270; PIN_NUMBER "12" at 840,2057.5 h25 r270; PIN_NUMBER "10" at 740,2057.5 h25 r270; PIN_NUMBER "11" at 790,2057.5 h25 r270; PIN_NUMBER "15" at 990,2057.5 h25 r270; PIN_NUMBER "5" at 850,2337.5 h25 r270; PIN_NUMBER "1" at 1050,2337.5 h25 r270; PIN_NUMBER "8" at 700,2337.5 h25 r270; PIN_NUMBER "7" at 750,2337.5 h25 r270; PIN_NUMBER "4" at 900,2337.5 h25 r270; PIN_NUMBER "16" at 1040,2057.5 h25 r270; PIN_NUMBER "2" at 1000,2337.5 h25 r270; PIN_NUMBER "3" at 950,2337.5 h25 r270; PIN_NUMBER "6" at 800,2337.5 h25 r270; PIN_NUMBER "13" at 890,2057.5 h25 r270; PIN_NUMBER "14" at 940,2057.5 h25 r270; Top Overlay "CH340G" at 805,2032.5 h25 r270; Top Overlay "***" at 865,2035 h25 r270; Top Overlay "***" at 835,2032.5 h25 r270; ASSEMBLY_TOP "CH340G" at 815,2225 h25 r270; ASSEMBLY_TOP "***" at 840,2225 h25 r270; ASSEMBLY_TOP "***" at 865,2225 h25 r270
U3: PIN_NUMBER "2" at 520,2455 h25 r180; PIN_NUMBER "1" at 720,2455 h25 r180; Top Overlay "***" at 520,2357 h31 r180; Top Overlay "***" at 520,2332 h31 r180; Top Overlay "HC-49S/12MHz" at 520,2307 h31 r180; ASSEMBLY_TOP "***" at 652,2530 h31 r180; ASSEMBLY_TOP "***" at 652,2505 h31 r180; ASSEMBLY_TOP "HC-49S/12MHz" at 652,2480 h31 r180
U4: PIN_NUMBER "1" at 1440,1331.5 h25 r270; PIN_NUMBER "2" at 1440,1268.5 h25 r270
U6: PIN_NUMBER "1" at 1740,2300 h25 r90; PIN_NUMBER "2" at 1740,2400 h25 r90; PIN_NUMBER "3" at 1740,2500 h25 r90